# Allegro board QV-601-Contril.brd
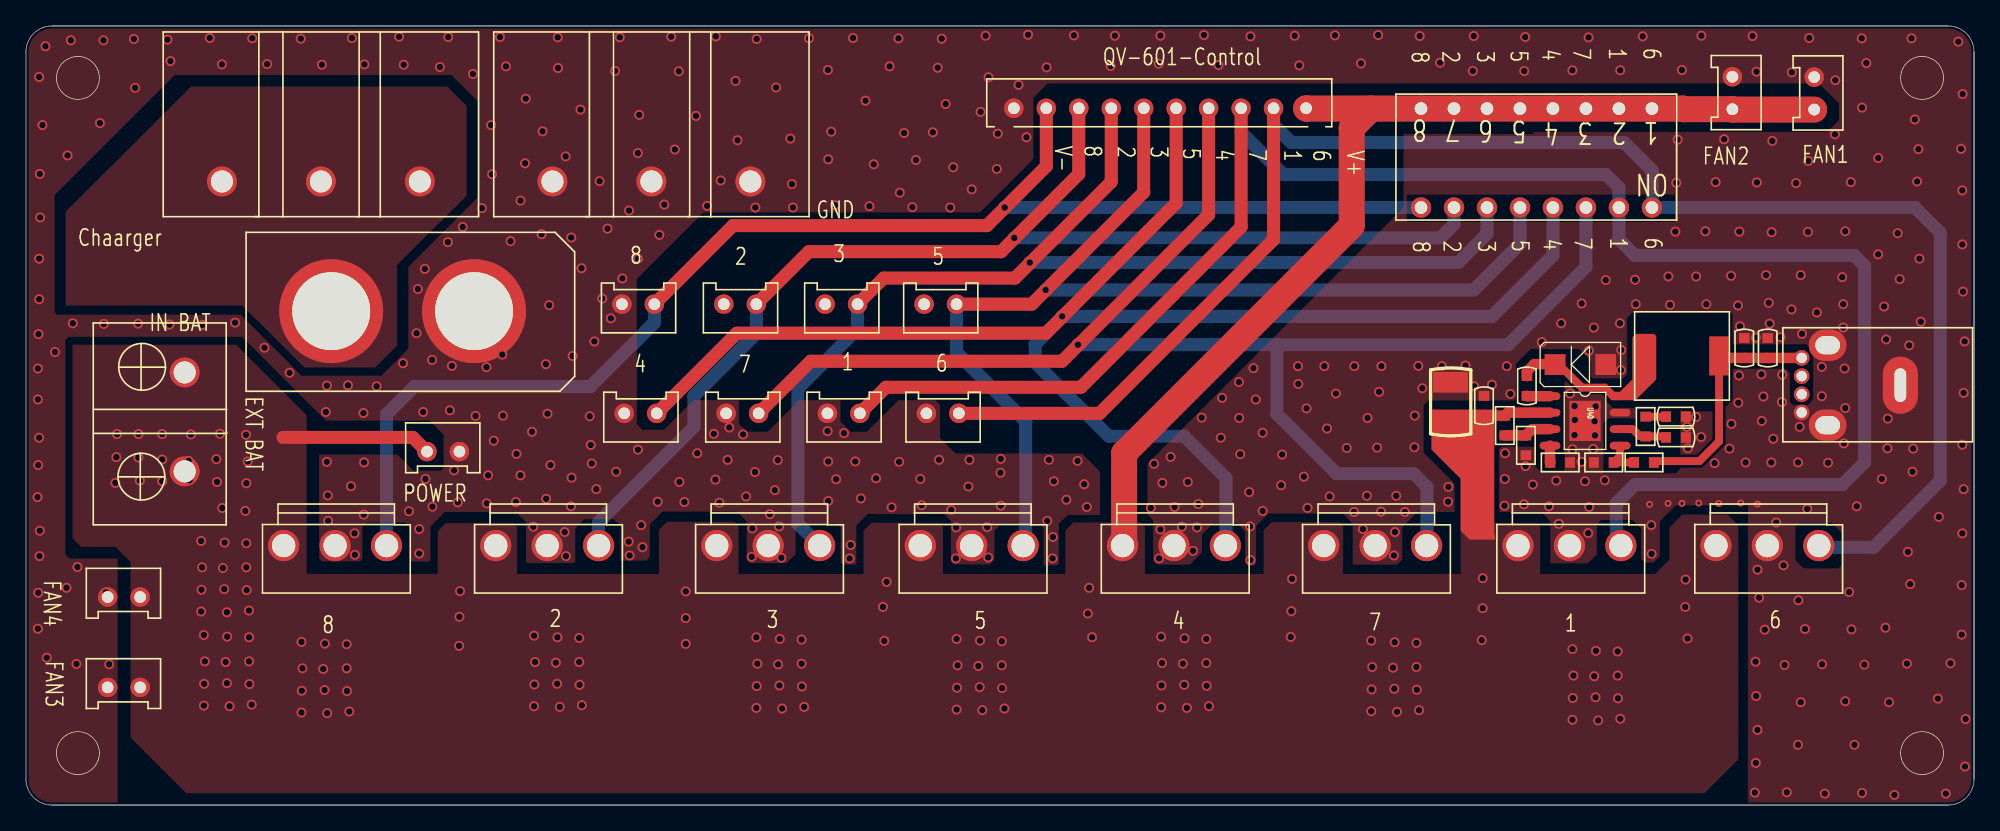
[diagram p0: board, top side]
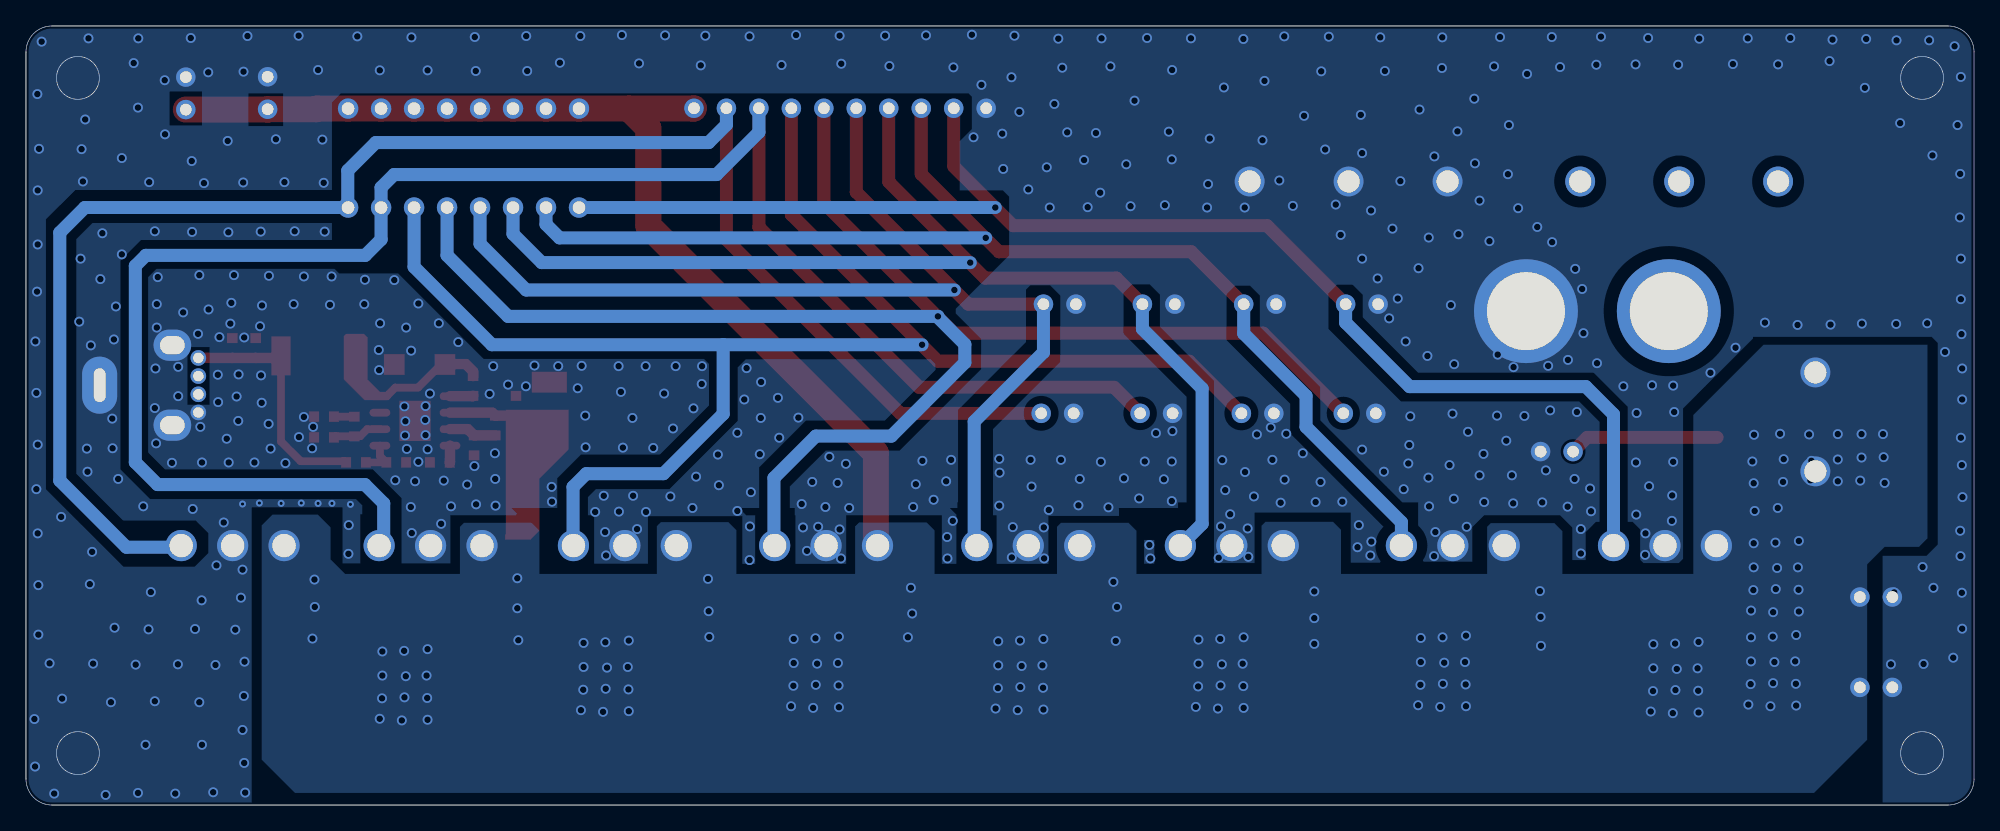
[diagram p1: board, bottom side, seen from below]

Outline 150 x 60 mm; copper layers: TOP, BOTTOM. Coordinates in mm from the lower left corner of the outline.
Outline path: circle c4,56 r1.65 ; circle c4,4 r1.65 ; circle c146,56 r1.65 ; circle c146,4 r1.65 ; 2,60 arc(0.59,59.41) 0,58 0,2 arc(0.59,0.59) 2,0 ; 2,60 148,60 ; 2,60 148,60 ; 148,60 arc(149.41,59.41) 150,58 ; 2,0 148,0 ; 2,0 148,0 ; 148,0 arc(149.41,0.59) 150,2 ; 150,58 150,2 ; 150,58 150,2

## Placement (name value [footprint] x y rotation side)
C52  100nF  [C0603]  115.57 32.28 90 top
C53  10UF/10V  [C0603]  134.11 35.2 90 top
C54  10UF/10V  [C0603]  132.31 35.2 90 top
C56  10UF/50V  [C1210]  109.7 31.05 90 top
C57  100nF  [C0603]  112.27 30.75 90 top
C58  100nF  [C0603]  127.05 28.31 180 top
C59  100nF  [C0603]  127.05 29.91 180 top
D1  SS34  [SMA]  119.69 33.93 180 top
J1  XT90PB-M  [XT90PBM]  23.5 38.04 0 top
J2  DBT50G-7.62-2P-BK-P  [DBT50G-7R62-2P1]  12.22 33.32 270 top
J3  ZX-XH2.54-2PZZ  [XH2R54-21]  8.79 9.06 180 top
J4  ZX-XH2.54-2PZZ  [XH2R54-21]  131.39 53.59 90 top
J5  ZX-XH2.54-2PZZ  [XH2R54-21]  137.69 53.56 90 top
J6  ZX-XH2.54-2PZZ  [XH2R54-21]  45.89 38.57 0 top
J7  ZX-XH2.54-2PZZ  [XH2R54-21]  53.74 38.57 0 top
J8  ZX-XH2.54-2PZZ  [XH2R54-21]  61.53 38.57 0 top
J9  ZX-XH2.54-2PZZ  [XH2R54-21]  69.15 38.57 0 top
J10  ZX-XH2.54-2PZZ  [XH2R54-21]  46.06 30.17 0 top
J11  ZX-XH2.54-2PZZ  [XH2R54-21]  33.38 27.22 180 top
J12  ZX-XH2.54-2PZZ  [XH2R54-21]  53.91 30.17 0 top
J13  ZX-XH2.54-2PZZ  [XH2R54-21]  61.71 30.17 0 top
J14  ZX-XH2.54-2PZZ  [XH2R54-21]  69.33 30.17 0 top
J15  ZX-XH2.54-2PZZ  [XH2R54-21]  8.79 16.02 180 top
L4  CYA0650-22UH  [L0650]  124.66 34.59 90 top
R35  42.2K  [R0603]  124.59 26.38 0 top
R36  8K  [R0603]  121.49 26.38 0 top
R37  51K  [R0603]  113.87 29.23 90 top
R38  10K  [R0603]  124.71 29.15 270 top
R39  8K  [R0603]  115.49 27.7 90 top
R40  160K  [R0603]  118.14 26.38 180 top
U1  DBT50G-7.62-3P-BK-P  [DBT50G-7R62-3P1]  22.71 49.12 180 top
U2  ZX-XH2.54-10PZZ  [XH2R54-10P1]  98.57 53.66 180 top
U3  DBT50G-7.62-3P-BK-P  [DBT50G-7R62-3P1]  48.16 49.12 180 top
U4  TA-08R  [TA-08R1]  125.2 46.02 180 top
U5  VH3.96-3P ZZ  [VH3R96-3P1]  118.85 19.98 0 top
U6  VH3.96-3P ZZ  [VH3R96-3P1]  23.8 19.98 0 top
U7  VH3.96-3P ZZ  [VH3R96-3P1]  40.13 19.98 0 top
U8  VH3.96-3P ZZ  [VH3R96-3P1]  57.15 19.98 0 top
U9  VH3.96-3P ZZ  [VH3R96-3P1]  72.82 19.98 0 top
U10  VH3.96-3P ZZ  [VH3R96-3P1]  88.39 19.98 0 top
U11  VH3.96-3P ZZ  [VH3R96-3P1]  103.89 19.98 0 top
U12  VH3.96-3P ZZ  [VH3R96-3P1]  134.09 19.98 0 top
U40  TPS54360BDDAR  [SOIC8E]  120.05 29.58 270 top
U41  -  [USB2R0_CECHA]  136.73 30.23 180 top

## Library data of the parts
C52-C54 C56-C59 = CAP NP
D1 = SS54
J1-J15 = CON2
L4 = JLSHC0630_3R3M
R35-R40 = R2
U1 U3 U5-U12 = CON3
U2 = CON10
U4 = DIP_8P
U40 = TPS54360BDDAR
U41 = USB2R0_CECHA

## Footprints (pads in the part's own frame, mm; a bottom-side part is the same pattern mirrored in y, then rotated)
C0603
  rect 0.762x0.813 smd: 1(-0.762,0) 2(0.762,0)
C1210
  rect 1.6x2.7 smd: 1(-1.516,0) 2(1.516,0)
DBT50G-7R62-2P1
  round 2.3 hole 1.7: 1(0,0) 2(7.62,0)
DBT50G-7R62-3P1
  round 2.3 hole 1.7: 1(-7.62,1.1) 2(0,1.1) 3(7.62,1.1)
L0650
  rect 3x1.5 smd: 1(0,0) 2(0,-5.7)
R0603
  rect 0.762x0.813 smd: 1(-0.762,0) 2(0.762,0)
SMA
  rect 1.6x1.6 smd: 1(-1.951,0) 2(1.951,0)
SOIC8E
  oval 0.6x1.6 smd: 1(-1.905,-2.7) 2(-0.635,-2.7) 3(0.635,-2.7) 4(1.905,-2.7) 5(1.905,2.7) 6(0.635,2.7) 7(-0.635,2.7) 8(-1.905,2.7)
  rect 3.1x2.4 smd: 9(0,0)
TA-08R1
  round 1.57 hole 0.97: 1(0,-7.62) 2(2.54,-7.62) 3(5.08,-7.62) 4(7.62,-7.62) 5(10.16,-7.62) 6(12.7,-7.62) 7(15.24,-7.62) 8(17.78,-7.62) 9(17.78,0) 10(15.24,0) 11(12.7,0) 12(10.16,0) 13(7.62,0) 14(5.08,0) 15(2.54,0) 16(0,0)
USB2R0_CECHA
  round 1.2 hole 0.8: 1(0,-4.2) 2(0,-2.8) 3(0,-1.4) 4(0,0)
  oval 2.9x2.4 hole 1.9x1.4: 5(-2,0.98) 6(-2,-5.18)
  oval 2.7x4.4 hole 0.9x2.6: 7(-7.6,-2.1)
VH3R96-3P1
  round 2.4 hole 1.8: 1(-3.96,0) 2(0,0) 3(3.96,0)
XH2R54-10P1
  round 1.5 hole 0.9: 1(0,0) 2(2.5,0) 3(5,0) 4(7.5,0) 5(10,0) 6(12.5,0) 7(15,0) 8(17.5,0) 9(20,0) 10(22.5,0)
XH2R54-21
  round 1.5 hole 0.9: 1(0,0) 2(2.5,0)
XT90PBM
  round 8 hole 6: 1(0,0) 2(11,0)

## Nets
GND: C53.2 C54.2 C56.2 C57.2 C58.1 C59.1 D1.1 J1.2 J3.2 J4.2 J5.2 J6.1 J7.1 J8.1 J9.1 J10.1 J11.1 J12.1 J13.1 J14.1 J15.2 R36.1 R39.1 R40.1 U2.10 U3.1 U3.2 U3.3 U5.2 U6.2 U7.2 U8.2 U9.2 U10.2 U11.2 U12.2 U40.7(GND#7) U40.9(GND#9) U41.4(GND) U41.5 U41.6 U41.7
VCC_5V: C53.1 C54.1 L4.2 R35.2 U41.1(VCC)
1.2: J8.2 U2.7 U4.11 U8.3
1.4: J10.2 U2.5 U4.13 U10.3
1.5: J9.2 U2.6 U4.12 U9.3
2.4: J14.2 U2.2 U4.16 U12.3
5.2: J12.2 U2.4 U4.14 U11.3
5.8: J6.2 U2.9 U4.9 U6.3
433: J13.2 U2.3 U4.15 U5.3
900: J7.2 U2.8 U4.10 U7.3
V+: C56.1 C57.1 J2.1 J2.2 J3.1 J4.1 J5.1 J11.2 J15.1 R37.2 U2.1 U4.1 U4.2 U4.3 U4.4 U4.5 U4.6 U4.7 U4.8 U5.1 U6.1 U7.1 U8.1 U9.1 U10.1 U11.1 U12.1 U40.2(VIN)
N41242: J1.1 U1.1 U1.2 U1.3
N62769: R37.1 R39.2 U40.3(EN)
N62809: R40.2 U40.4(RT/CLK)
N62825: C52.1 U40.1(BOOT)
N62837: C52.2 D1.2 L4.1 U40.8(SW)
N62937: C58.2 R38.2 U40.6(COMP)
N62993: C59.2 R38.1
N63043: R35.1 R36.2 U40.5(FB)

Pads without a net: U41 2 3

## Via types
v1: diameter 0.762, hole 0.508, TOP to BOTTOM, 661 vias
v2: diameter 0.54, hole 0.254, TOP to BOTTOM, 7 vias

## Routing (per net, layer and track width the routed paths; a pad name or vN(x,y) marks a point on that pad's centre or on a via; arc(x,y) is an arc through that point)
GND:
  vias: v1(0.89,23.72) v1(0.97,36.26) v1(0.91,33.62) v1(0.91,31.23) v1(0.94,26.18) v1(0.94,16.35) v1(0.91,13.58) v1(1.02,56.08) v1(1.07,48.61) v1(1.09,45.26) v1(1.02,42.08) v1(1.02,38.96) v1(1.02,28.29) v1(1.07,21.13) v1(1.04,19.17) v1(1.27,52.37) v1(1.5,58.44) v1(1.6,11.35) v1(2.24,34.89) v1(3.2,50.03) v1(3.12,16.73) v1(3.45,58.9) v1(3.61,37.1) v1(3.89,10.86) v1(3.96,18.33) v1(5.69,52.52) v1(5.97,58.9) v1(5.99,37.05) v1(6.15,16.38) v1(6.4,10.84) v1(8.31,59) v1(8.41,55.24) v1(8.64,37.08) v1(10.9,58.95) v1(11.05,37) v1(11.13,57.29) v1(13.59,36.97) v1(14.15,59.07) v1(15.09,57.04) v1(16.1,37.15) v1(17.42,59.05) v1(18.36,35.22) v1(18.57,57.07) v1(20.29,33.29) v1(21.16,59.02) v1(22.78,57.02) v1(23.09,30.27) v1(23.16,32.3) v1(23.16,26.43) v1(23.24,23.84) v1(23.27,21.89) v1(24.79,32.33) v1(25.1,59.07) v1(25.02,24.55) v1(25.3,20.92) v1(25.32,19.27) v1(25.98,30.19) v1(26.01,22.37) v1(26.06,57.04) v1(26.03,26.38) v1(27,32.25) v1(28.73,59.17) v1(29.08,57.02) v1(29.03,34.03) v1(29.49,22.62) v1(29.57,24.38) v1(30.07,36.34) v1(30.18,39.74) v1(30.28,21.25) v1(30.28,19.37) v1(30.58,30.27) v1(30.71,41.29) v1(30.76,25.11) v1(31.27,34.28) v1(31.29,22.98) v1(31.88,56.84) v1(32.49,43.35) v1(32.51,59.15) v1(32.64,30.4) v1(32.79,33.83) v1(32.97,25.77) v1(33.25,23.31) v1(33.63,44.52) v1(34.42,56.3) v1(34.62,29.96) v1(35.1,45.97) v1(35.46,33.72) v1(35.48,23.23) v1(35.59,25.39) v1(35.81,52.37) v1(35.89,48.58) v1(36.02,28.06) v1(36.5,59.15) v1(36.68,34.69) v1(36.73,29.99) v1(36.96,56.89) v1(37.31,43.43) v1(37.77,27.04) v1(37.72,23.34) v1(38.07,46.55) v1(38.07,25.39) v1(38.48,54.4) v1(38.43,49.42) v1(38.96,28.75) v1(39.07,21.43) v1(39.7,43.96) v1(39.78,51.88) v1(40.03,33.95) v1(40.06,23.59) v1(40.16,30.14) v1(40.28,38.5) v1(40.39,26.18) v1(40.94,59.12) v1(40.97,56.76) v1(41.48,21.02) v1(41.55,49.95) v1(41.58,19.17) v1(41.99,43.71) v1(41.96,23) v1(42.09,34.59) v1(42.01,25.21) v1(42.7,53.56) v1(42.77,41.34) v1(43.41,29.94) v1(43.48,27.73) v1(43.56,26.31) v1(43.76,35.7) v1(43.92,24.33) v1(44.17,48.05) v1(44.37,39.01) v1(44.78,44.39) v1(45.03,37.48) v1(45.36,56.53) v1(45.44,25.67) v1(45.72,59.12) v1(45.92,40.56) v1(46.41,20.29) v1(46.43,45.79) v1(46.48,19.22) v1(47.12,50.21) v1(47.12,42.08) v1(47.12,27.37) v1(47.22,53.15) v1(47.37,21.56) v1(47.47,19.86) v1(48.64,23.36) v1(48.77,43.91) v1(49.15,46.25) v1(49.68,59.17) v1(49.96,50.49) v1(50.27,56.51) v1(50.32,24.88) v1(50.7,23.34) v1(51.59,53.08) v1(51.69,27.09) v1(52.45,46.14) v1(52.96,28.59) v1(53.09,25.06) v1(53.11,59.2) v1(53.39,23.28) v1(53.49,48.1) v1(54.03,26.59) v1(54.15,29.08) v1(54.64,55.77) v1(54.79,51.2) v1(55.22,28.54) v1(55.45,23.77) v1(55.88,19.12) v1(55.93,21.3) v1(56.16,46.02) v1(56.13,25.65) v1(56.26,59) v1(57.28,22.4) v1(57.66,24.25) v1(57.76,55.26) v1(57.89,26.56) v1(57.99,21.46) v1(58.17,19.04) v1(58.85,51.33) v1(58.98,47.82) v1(59.05,46.02) v1(60.3,59.05) v1(61.75,56.61) v1(61.77,49.73) v1(61.72,28.8) v1(61.77,26.46) v1(61.77,23.41) v1(62,51.86) v1(62.31,46.2) v1(62.38,25.09) v1(62.99,28.64) v1(63.5,20.03) v1(63.42,18.99) v1(63.68,59.07) v1(63.86,26.46) v1(64.29,23.61) v1(64.64,54.25) v1(64.95,46.12) v1(65.28,49.34) v1(65.46,25.16) v1(66.5,56.89) v1(66.65,22.93) v1(67.18,59.05) v1(67.28,47.16) v1(67.23,26.43) v1(67.61,51.76) v1(68.25,46.04) v1(68.53,49.67) v1(68.86,25.11) v1(68.96,23.08) v1(69.82,51.81) v1(70.21,56.79) v1(70.31,26.59) v1(70.51,59.02) v1(70.82,53.99) v1(71.17,46.02) v1(71.25,22.73) v1(71.4,49.12) v1(71.6,18.99) v1(71.63,21.38) v1(72.57,24.53) v1(72.64,26.59) v1(72.82,47.41) v1(73.51,53.38) v1(73.89,59.25) v1(74.02,21.4) v1(74.09,19.07) v1(74.12,56.05) v1(74.75,48.99) v1(74.83,51.71) v1(75.06,26.66) v1(75.03,25.6) v1(75.06,23.06) v1(76.43,55.47) v1(77.04,51.43) v1(77.17,59.33) v1(78.59,56.81) v1(78.64,21.89) v1(78.77,26.59) v1(79.07,20.64) v1(79.04,18.99) v1(79.15,24.94) v1(80.11,23.51) v1(80.7,59.28) v1(80.98,26.51) v1(81.48,24.71) v1(81.69,22.95) v1(83.52,56.91) v1(83.85,59.25) v1(86.61,22.88) v1(86.87,26.28) v1(87.22,57.09) v1(87.25,18.99) v1(87.35,59.25) v1(87.35,21.23) v1(87.5,24.81) v1(88.14,26.81) v1(88.44,22.95) v1(89,21.43) v1(89.46,24.88) v1(89.87,19.58) v1(90.17,21.38) v1(90.27,23.18) v1(90.53,29.84) v1(90.7,59.3) v1(91.82,56.99) v1(92,28.29) v1(92.1,31.36) v1(93.4,32.58) v1(93.42,29.81) v1(93.5,27.02) v1(94.18,24.1) v1(94.28,59.2) v1(94.26,21.46) v1(94.28,18.86) v1(94.51,33.65) v1(94.69,31.23) v1(95.22,28.67) v1(95.22,22.65) v1(96.65,24.63) v1(96.72,26.99) v1(97.69,59.25) v1(97.94,33.8) v1(97.97,32.43) v1(98.04,56.96) v1(98.4,25.29) v1(98.6,30.55) v1(98.68,22.88) v1(99.97,33.8) v1(100.18,29) v1(100.38,23.77) v1(100.79,59.28) v1(100.86,31.69) v1(101.7,27.5) v1(102.29,33.8) v1(102.26,22.57) v1(102.79,57.12) v1(102.95,21.25) v1(103.3,29.81) v1(103.25,23.82) v1(104.04,27.53) v1(104.11,59.3) v1(104.19,31.82) v1(104.37,33.8) v1(104.34,22.6) v1(105.33,19.22) v1(105.41,21.02) v1(105.51,23.82) v1(106.17,22.57) v1(106.91,27.55) v1(106.93,29.99) v1(107.21,33.83) v1(107.31,59.23) v1(107.52,32.1) v1(108.89,57.17) v1(109.02,33.8) v1(109.5,23.36) v1(109.52,24.5) v1(110.85,33.85) v1(111.4,56.53) v1(111.48,59.23) v1(111.51,32.25) v1(112.88,32.38) v1(113.89,27.09) v1(113.87,25.11) v1(113.84,23.06) v1(114.02,33.8) v1(114.3,31.67) v1(115.37,56.53) v1(115.34,23.16) v1(115.44,59.15) v1(115.47,26.1) v1(116.03,24.68) v1(116.71,35.65) v1(117.27,23) v1(117.83,24.99) v1(118.03,21.66) v1(118.21,37.1) v1(118.9,31.69) v1(119.08,56.58) v1(119.08,27.4) v1(119.24,30.73) v1(119.26,29.66) v1(119.24,28.49) v1(119.79,38.63) v1(119.79,26.43) v1(120.04,24.94) v1(120.29,20.95) v1(120.32,59.12) v1(120.35,34.99) v1(120.37,22.95) v1(120.68,27.42) v1(120.73,36.77) v1(120.78,29.56) v1(120.86,30.7) v1(120.81,28.47) v1(121.56,25.01) v1(121.64,40.43) v1(122.76,56.58) v1(122.73,37.1) v1(122.81,33.49) v1(122.83,35.04) v1(123.9,40.45) v1(123.95,38.57) v1(124.49,59.2) v1(125.15,21.56) v1(125.17,19.35) v1(126.47,40.71) v1(126.59,38.52) v1(127,44.16) v1(127.08,47.92) v1(127.18,51.25) v1(127.51,56.61) v1(127.89,29.13) v1(127.97,27.48) v1(128.6,40.71) v1(128.6,29.89) v1(129.01,59.25) v1(128.98,28.34) v1(129.31,44.19) v1(129.39,38.57) v1(130.1,47.97) v1(130.02,26.33) v1(130.76,51.27) v1(131.17,27.45) v1(131.29,40.76) v1(131.32,29.35) v1(131.83,38.47) v1(131.9,33.09) v1(131.85,30.98) v1(131.93,44.16) v1(131.98,36.87) v1(132.41,26.38) v1(132.94,59.23) v1(133.2,36.01) v1(133.17,11.04) v1(133.2,3.24) v1(133.12,0.96) v1(133.25,56.48) v1(133.27,47.95) v1(133.22,8.4) v1(133.32,18.13) v1(133.32,5.78) v1(133.45,15.97) v1(133.63,33.16) v1(133.65,29.58) v1(133.78,31.46) v1(133.88,13.51) v1(133.99,40.81) v1(134.19,38.68) v1(134.26,37.08) v1(134.39,26.38) v1(134.47,51.15) v1(134.42,44.11) v1(134.54,28.21) v1(134.77,21.76) v1(135.1,36.04) v1(135.2,31.03) v1(135.23,33.14) v1(135.33,18.46) v1(135.41,10.79) v1(135.59,0.98) v1(135.97,56.43) v1(135.94,38.17) v1(136.3,47.9) v1(136.45,26.38) v1(136.47,15.77) v1(136.45,4.64) v1(136.58,29.13) v1(136.65,40.81) v1(136.65,7.92) v1(136.75,36.29) v1(136.98,13.56) v1(137.16,22.8) v1(137.24,49.6) v1(137.21,44.14) v1(137.31,59.07) v1(137.9,37.94) v1(138.28,33.75) v1(138.28,31.49) v1(138.3,10.84) v1(138.51,0.88) v1(138.76,26.36) v1(139.29,51.66) v1(139.32,55.82) v1(139.85,40.66) v1(139.93,38.57) v1(139.93,36.77) v1(139.98,27.86) v1(140.08,44.19) v1(140.03,33.62) v1(140.08,30.57) v1(140.08,7.99) v1(140.39,16.4) v1(140.51,47.97) v1(140.56,13.53) v1(140.79,4.64) v1(140.97,23) v1(141.35,59.05) v1(141.38,53.71) v1(141.38,0.93) v1(141.55,10.81) v1(141.71,57.14) v1(142.62,49.83) v1(142.62,42.41) v1(142.9,25.11) v1(143.08,38.4) v1(143.18,13.66) v1(143.23,35.86) v1(143.36,29.76) v1(143.33,27.48) v1(143.46,7.92) v1(143.87,0.78) v1(144.12,44.04) v1(144.27,40.51) v1(144.91,19.5) v1(144.83,10.89) v1(145.01,35.4) v1(145.08,17.01) v1(145.19,59.05) v1(145.26,25.67) v1(145.31,27.45) v1(145.44,52.8) v1(145.62,48.02) v1(145.72,50.51) v1(145.8,42.08) v1(145.9,37.23) v1(147.29,22.19) v1(147.22,8.2) v1(147.83,0.88) v1(148.18,10.91) v1(148.79,58.79) v1(149,50.54) v1(149.1,47.34) v1(149.1,43.17) v1(149.1,27.75) v1(149.1,20.92) v1(149.05,16.93) v1(149.05,13.12) v1(149.12,54.75) v1(149.15,39.54) v1(149.2,31.74) v1(149.2,24.33) v1(149.28,35.7) v1(149.3,2.96) v1(149.35,6.62) v2(125.02,23.16) v2(126.44,23.23) v2(127.51,23.23) v2(128.8,23.26) v2(130.35,23.23) v2(132.03,23.26) v2(133.32,23.18)
VCC_5V: length 18.7
  TOP w0.6: R35.2 125.45,26.48 128.85,26.48 130.36,27.99 L4.2
  TOP w0.8: U41.1 C53.1 C54.1 130.52,34.43 L4.2
1.2: length 88.5
  TOP w1: 77.29,41.72 v1(77.29,41.78) ; 77.29,41.72 76.15,40.58 66.04,40.58 J8.2 ; 77.29,41.72 83.57,48 U2.7
  BOTTOM w1: v1(77.29,41.78) 110.29,41.78 112.5,43.99 U4.11 ; U8.3 59.44,21.66 59.44,32.07 64.03,36.67 J8.2
1.4: length 125.5
  TOP w1: 79.78,37.58 88.57,46.37 U2.5 ; 79.78,37.58 78.54,36.34 54.74,36.34 J10.2 ; 79.78,37.58 v1(79.78,37.64)
  BOTTOM w1: U4.13 117.58,42.33 112.88,37.64 v1(79.78,37.64) 79.78,37.56 77.71,35.48 77.71,34.07 83.36,28.41 89.18,28.41 92.41,25.19 92.41,20.04 U10.3
1.5: length 86.2
  TOP w1: 78.51,39.64 v1(78.51,39.67) ; 78.51,39.64 86.07,47.2 U2.6 ; 78.51,39.64 77.44,38.57 J9.2
  BOTTOM w1: v1(78.51,39.67) 111.48,39.67 115.04,43.22 U4.12 ; J9.2 71.65,34.87 76.99,29.53 76.99,20.19 U9.3
2.4: length 128.3
  TOP w1: U2.2 96.07,43.56 82.68,30.17 J14.2
  BOTTOM w1: U2.2 96.07,52.39 97.43,51.02 123.06,51.02 125.22,48.86 125.22,46.04 U4.16 145.47,46.02 147.4,44.09 147.4,24.99 142.27,19.86 138.17,19.86 U12.3
5.2: length 119.2
  TOP w1: 81,35.4 79.78,34.18 60.43,34.18 J12.2 ; 81,35.4 v1(81,35.45) ; 81,35.4 91.07,45.46 U2.4
  BOTTOM w1: v1(81,35.45) 96.32,35.45 ; 96.32,35.45 114.12,35.45 120.12,41.45 U4.14 ; 96.32,35.45 96.32,30.12 100.91,25.52 106.86,25.52 107.87,24.5 107.87,20.01 U11.3
5.8: length 106.2
  TOP w1: 75.36,45.99 73.99,44.62 54.43,44.62 J6.2 ; 75.36,45.99 v1(75.36,46.02) ; 75.36,45.99 78.57,49.2 U2.9
  BOTTOM w1: J6.2 48.39,37.15 43.46,32.23 29.9,32.23 27.76,30.09 U6.3 ; U4.9 v1(75.36,46.02)
433: length 139.9
  TOP w1: J13.2 66.22,32.17 81.23,32.17 93.57,44.51 U2.3
  BOTTOM w1: U5.3 122.45,20.34 122.45,23.23 123.9,24.68 139.87,24.68 141.58,26.39 141.58,41.52 140.77,42.33 123.88,42.33 122.66,43.55 U4.15 122.66,47.56 121.66,48.56 96.82,48.56 93.57,51.82 U2.3
900: length 93.3
  TOP w1: 76.1,43.63 v1(76.1,43.68) ; 76.1,43.63 75.08,42.61 60.27,42.61 J7.2 ; 76.1,43.63 81.07,48.6 U2.8
  BOTTOM w1: U7.3 44.09,21.78 51.44,29.13 51.44,31.51 56.24,36.31 J7.2 ; v1(76.1,43.68) 108.92,43.68 109.96,44.72 U4.10
V+: length 97.5
  TOP w0.8: U40.2 114.1,30.22 R37.2 C57.1
  TOP w1: J11.2 29.78,28.31 19.79,28.31
  TOP w2: J5.1 131.42,53.56 J4.1 127.64,53.59 127.59,53.64 U4.1 U4.2 U4.3 U4.4 U4.5 U4.6 U4.7 U4.8 103.58,53.64 ; U10.1 84.56,20.11 84.56,27.09 102.08,44.62 102.08,52.14 103.58,53.64 ; 103.58,53.64 98.59,53.64 U2.1
  vias: v1(6.88,24.81) v1(6.96,26.79) v1(7.01,28.57) v1(8.66,28.57) v1(8.66,26.76) v1(8.76,24.99) v1(10.49,28.57) v1(10.49,26.61) v1(10.49,24.94) v1(12.52,26.51) v1(12.6,25.01) v1(12.7,28.54) v1(13.49,20.34) v1(13.49,14.9) v1(13.56,18.31) v1(13.51,16.58) v1(13.69,13.1) v1(13.69,7.66) v1(13.77,11.06) v1(13.72,9.34) v1(14.66,26.64) v1(14.71,24.88) v1(14.94,28.59) v1(15.11,22.88) v1(15.16,18.26) v1(15.29,20.21) v1(15.27,16.63) v1(15.37,11.01) v1(15.47,14.85) v1(15.5,12.97) v1(15.47,9.39) v1(15.68,7.61) v1(16.89,22.65) v1(16.94,28.52) v1(16.97,24.78) v1(16.97,20.16) v1(16.97,18.31) v1(16.99,16.55) v1(17.07,26.46) v1(17.17,14.98) v1(17.17,12.92) v1(17.17,11.06) v1(17.2,9.31) v1(17.38,7.74) v1(21.21,12.56) v1(21.29,10.53) v1(21.24,8.8) v1(21.21,7.13) v1(22.89,10.48) v1(22.99,8.85) v1(23.02,12.44) v1(23.19,7.08) v1(24.69,12.38) v1(24.69,10.53) v1(24.72,8.78) v1(24.9,7.2) v1(33.38,14.5) v1(33.35,12.26) v1(33.43,16.48) v1(39.12,13.04) v1(39.2,11.01) v1(39.15,9.29) v1(39.12,7.61) v1(40.8,10.96) v1(40.9,9.34) v1(40.92,12.92) v1(41.1,7.56) v1(42.6,12.87) v1(42.6,11.01) v1(42.63,9.26) v1(42.8,7.69) v1(50.8,16.45) v1(50.8,14.39) v1(50.8,12.41) v1(56.24,12.92) v1(56.27,9.16) v1(56.24,7.48) v1(56.32,10.89) v1(57.92,10.84) v1(58.04,12.79) v1(58.02,9.21) v1(58.22,7.43) v1(59.72,12.74) v1(59.72,10.89) v1(59.74,9.13) v1(59.92,7.56) v1(65.99,15.26) v1(66.09,12.64) v1(66.27,17.19) v1(71.66,12.79) v1(71.68,9.03) v1(71.66,7.36) v1(71.73,10.76) v1(73.33,10.71) v1(73.46,12.66) v1(73.44,9.08) v1(73.64,7.3) v1(75.14,12.61) v1(75.14,10.76) v1(75.16,9.01) v1(75.34,7.43) v1(81.76,14.75) v1(81.86,16.73) v1(82.09,12.92) v1(87.41,12.97) v1(87.41,7.53) v1(87.48,10.94) v1(87.43,9.21) v1(89.08,10.89) v1(89.21,12.84) v1(89.18,9.26) v1(89.39,7.48) v1(90.89,12.79) v1(90.89,10.94) v1(90.91,9.18) v1(91.09,7.61) v1(97.38,12.95) v1(97.49,17.42) v1(97.43,14.93) v1(103.59,12.66) v1(103.59,7.23) v1(103.66,10.63) v1(103.61,8.9) v1(105.26,10.58) v1(105.39,12.54) v1(105.36,8.96) v1(105.57,7.18) v1(107.07,12.49) v1(107.07,10.63) v1(107.09,8.88) v1(107.27,7.3) v1(112.09,12.69) v1(112.17,17.47) v1(112.17,15.16) v1(119.08,12) v1(119.1,8.24) v1(119.08,6.57) v1(119.16,9.97) v1(120.76,9.92) v1(120.88,11.88) v1(120.86,8.3) v1(121.06,6.52) v1(122.56,11.83) v1(122.56,9.97) v1(122.58,8.22) v1(122.76,6.64) v1(127.79,17.37) v1(127.76,15.26) v1(127.94,12.82)
N62769: length 3.7
  TOP w0.8: R37.1 R39.2 115.98,28.95 U40.3
N62809: length 1.3
  TOP w0.8: R40.2 117.35,26.41 U40.4
N62825: length 1.8
  TOP w0.8: C52.1 115.6,31.49 U40.1
N62837: length 8.8
  TOP w0.6: U40.8 122.22,31.49 121.56,32.15 119.81,32.15 118.03,33.93 D1.2
  TOP w0.8: D1.2 117.71,33.96 116.14,33.96 115.57,33.39 C52.2
N62937: length 3.8
  TOP w0.6: C58.2 126.21,28.39 R38.2 124.69,28.41 124.26,28.41 123.72,28.95 U40.6
N62993: length 1.6
  TOP w0.6: R38.1 C59.2
N63043: length 3.1
  TOP w0.6: R35.1 R36.2 122.75,26.88 U40.5

## Copper pours and planes (outline as drawn; the poured copper is in the pictures)
GND on TOP: 0.2,58 0.73,59.27 2,59.8 148,59.8 149.27,59.27 149.8,58 149.8,2 149.27,0.73 148,0.2 13.23,0.2 13.23,12.06 13.28,12.01 131.37,12.01 131.37,2.66 13.54,2.66 13.54,0.22 132.59,0.22 132.59,23.08 127.03,23.08 125.81,21.86 125.81,19.17 125.3,18.66 124.66,18.66 124.36,18.97 124.36,21.3 123.7,21.96 121.31,21.96 120.95,21.61 120.95,19.3 120.27,18.61 117.37,18.61 117.37,21.86 116.66,22.57 113.44,22.57 113.44,27.43 113.61,27.6 116.1,27.6 116.15,27.55 116.15,26.13 116.66,25.62 118.47,25.62 118.47,33.09 118.54,33.16 119.38,32.33 120.88,32.33 121.62,31.59 121.62,31.16 122.2,30.57 124.03,30.57 124.28,30.32 124.69,30.32 124.16,29.79 121.84,29.79 121.46,29.41 121.46,25.57 121.49,25.54 127.03,25.54 127.38,25.9 127.38,30.32 130.53,30.32 131.42,31.21 131.42,33.58 131.44,33.6 135.51,33.6 135.81,33.29 135.81,31.06 136.09,30.78 137.16,30.78 137.62,31.23 137.62,34.97 137.1,35.49 131.42,35.49 131.42,37.76 131.22,37.97 123.72,37.97 123.29,37.53 123.29,33.16 122.99,32.86 120.65,32.86 120.52,32.99 120.52,34.18 119.58,35.12 115.87,35.12 114.73,33.98 114.73,31.31 114.58,31.16 108,31.16 107.62,30.78 107.62,27.15 110.01,24.75 110.01,22.57 107.14,22.57 105.97,21.4 105.97,18.92 105.56,18.51 102.21,18.51 102.16,18.56 102.16,21.68 101.4,22.45 95.68,22.45 94.72,21.48 94.72,18.59 94.56,18.43 94.08,18.43 93.88,18.64 93.88,21.05 93.22,21.71 91.41,21.71 90.55,20.85 90.55,19.45 89.61,18.51 87.1,18.51 86.79,18.81 86.79,21.94 86.39,22.34 86.36,22.34 86.36,26.31 106.07,46.02 106.07,51.68 115.98,51.68 116.13,51.83 138.68,51.83 139.6,52.75 139.6,54.04 138.07,55.57 78.66,55.57 77.57,54.48 77.57,49.75 73.46,45.64 52.15,45.64 47.04,40.53 47.04,29.33 47.47,28.9 49.12,28.9 51.41,31.18 54.91,31.18 54.91,29.35 55.52,28.75 57.12,28.75 59.56,31.18 62.71,31.18 62.71,29.56 63.53,28.75 64.74,28.75 67.18,31.18 70.03,31.18 70.38,30.83 70.38,28.26 71.58,27.07 81.31,27.07 82.7,25.67 82.7,22.34 80.21,22.34 79.53,21.66 79.53,18.59 79.4,18.46 78.36,18.46 78.36,21.33 78.11,21.58 75.03,21.58 74.57,21.13 74.57,18.89 74.22,18.53 71.45,18.53 71.22,18.76 71.22,21.86 70.66,22.42 64.82,22.42 63.93,21.53 63.93,18.59 63.86,18.51 62.89,18.51 62.74,18.66 62.74,21.35 62.43,21.66 59.69,21.66 59.26,21.23 59.26,19.32 58.57,18.64 55.73,18.64 55.5,18.86 55.5,21.86 54.76,22.6 49.02,22.6 48.03,21.61 48.03,19.09 47.75,18.81 45.8,18.81 45.8,21.48 45.26,22.01 42.98,22.01 42.29,21.33 42.29,18.74 42.19,18.64 38.61,18.64 38.51,18.74 38.51,21.79 37.72,22.57 32.26,22.57 31.14,21.46 31.14,18.84 31.04,18.74 29.69,18.74 29.57,18.86 29.57,21.35 29.16,21.76 26.26,21.76 25.91,21.4 25.91,18.94 25.73,18.76 22.78,18.76 22.58,18.97 22.58,26.99 28.59,26.99 29.84,25.75 31.95,25.75 32.16,25.95 32.16,28.52 31.06,29.61 23.09,29.61 16.64,36.06 3.28,36.06 3.02,35.81 3.02,19.3 3.33,18.99 7.06,18.99 7.06,0.2 2,0.2 0.73,0.73 0.2,2 ; 3 cut-outs
GND on BOTTOM: 63.12,20.41 63.12,18.59 63.91,18.59 63.91,20.41
GND on BOTTOM: 2,0.2 0.73,0.73 0.2,2 0.2,58 0.73,59.27 2,59.8 148,59.8 149.27,59.27 149.8,58 149.8,2 149.27,0.73 148,0.2 13.11,0.2 13.11,14.04 29.9,14.04 29.9,17.04 36.27,17.04 37.72,18.48 37.72,18.71 37.84,18.92 37.98,19.12 38.05,19.12 38.58,18.59 37.85,18.59 37.85,17.21 43.97,17.21 43.97,17.99 44.41,18.01 44.83,18.12 44.83,17.8 49.1,17.8 49.1,18.66 51.69,18.66 53.19,17.98 54.69,18.66 55.4,18.66 55.4,22.52 47.99,22.52 47.99,18.66 45.59,18.66 46.09,20.07 45.47,21.43 52.65,28.62 52.65,30.9 57.56,35.81 57.56,39.31 56.87,40 55.75,40 54.99,39.24 54.99,36.85 50.34,32.2 50.34,29.63 44.02,23.31 42.8,23.31 42.8,21.51 42.1,20.18 42.53,18.74 38.63,18.74 38.63,21.41 37.72,22.32 31.88,22.32 30.94,21.38 30.94,18.89 30.91,18.86 29.9,18.86 29.9,21.02 29.11,21.81 28.83,21.81 28.83,29.51 30.4,31.08 44.12,31.08 49.71,36.67 49.71,39.41 49.05,40.07 47.85,40.07 47.07,39.29 47.07,37.56 42.8,33.29 29.29,33.29 26.67,30.68 26.67,21.81 26.29,21.81 25.7,21.23 25.7,18.89 25.45,18.64 22.73,18.64 22.4,18.97 22.4,30.55 17.02,35.93 17.02,36.06 3.28,36.06 2.79,35.58 2.79,20.06 3.66,19.19 7.04,19.19 7.04,0.2 ; 14 cut-outs
V+ on TOP (solid shape): 113.06,20.87 113.11,20.82 113.11,20.44 111.15,20.44 110.46,21.13 110.46,25.14 108.23,27.37 108.23,30.45 113.06,30.45
V+ on TOP: 12.34,0.91 8.05,5.2 8.05,18.71 6.88,19.88 4.24,19.88 3.58,20.54 3.58,35.45 16.18,35.45 21.62,30.02 21.62,17.8 31.7,17.8 31.7,21.1 32.31,21.71 37.52,21.71 37.82,21.4 37.82,17.8 48.74,17.8 48.74,21.2 49.35,21.81 54.56,21.81 54.86,21.51 54.86,17.8 64.49,17.8 64.49,21.13 65.1,21.73 70.31,21.73 70.61,21.43 70.61,17.8 80.04,17.8 80.04,21.15 80.64,21.76 85.85,21.76 86.16,21.46 86.16,17.8 95.3,17.8 95.3,21.18 95.91,21.79 101.12,21.79 101.42,21.48 101.42,17.8 110.46,17.8 110.46,21.13 111.07,21.73 116.28,21.73 116.59,21.43 116.59,17.8 125.43,17.8 126.54,18.92 126.54,21.38 127.53,22.37 131.01,22.37 131.85,21.53 131.85,3.52 129.24,0.91
V+ on BOTTOM: 3.58,35.45 16.21,35.45 21.62,30.04 21.62,17.8 31.7,17.8 31.7,21.1 32.31,21.71 37.21,21.71 37.49,21.43 37.49,17.8 48.74,17.8 48.74,21.2 49.35,21.81 54.56,21.81 54.86,21.51 54.86,17.8 64.49,17.8 64.49,21.13 65.1,21.73 70.31,21.73 70.61,21.43 70.61,17.8 80.04,17.8 80.04,21.15 80.64,21.76 85.85,21.76 86.16,21.46 86.16,17.8 95.3,17.8 95.3,21.18 95.91,21.79 101.12,21.79 101.42,21.48 101.42,17.8 110.46,17.8 110.46,21.13 111.07,21.73 116.28,21.73 116.59,21.43 116.59,17.8 125.43,17.8 126.54,18.92 126.54,21.38 127.53,22.37 131.01,22.37 131.85,21.53 131.85,3.5 129.29,0.93 12.32,0.93 8.23,5.02 8.23,18.53 6.88,19.88 4.24,19.88 3.58,20.54
N41242 on TOP: 21.44,33.7 17.81,37.33 17.81,37.3 16.64,38.47 3.05,38.47 3.05,45.69 12.7,55.34 32.44,55.34 33.93,53.84 33.93,46.93 31.88,44.87 31.85,44.87 28.57,41.6 28.57,35.37 26.9,33.7
N62837 on TOP (solid shape): 125.53,36.11 125.53,32.78 123.93,31.18 122.1,31.18 121.92,31.36 121.92,31.82 122.73,31.82 123.7,32.78 123.7,36.01 123.98,36.29 125.35,36.29

## Text on the board
Ref Des/Silkscreen Top: Chaarger | IN BAT | 8 | POWER | 2 | 4 | 7 | 3 | GND | 1 | 5 | 6 | QV-601-Control | FAN2 | FAN1 | FAN4 | FAN3 | EXT BAT | V- | V+
User.11: FIGURE | SIZE | 0.254 | 0.508 | 0.8 | 0.9 | 0.97 | 1.7 | 1.8 | 6.0 | 1.9x1.4 | 2.6x0.9 | DRILL CHART: TOP to BOTTOM | ALL UNITS ARE IN MILLIMETERS | PLATED | QTY | 7 | 661 | 4 | 36 | 16 | 8 | 24 | 2 | 1
